# Altium PCB PIPOCPUD_2006.PCBDOC (part 9 of 10)
Units mm, origin at the board's own origin, x right, y up, seen from the top; angles counter-clockwise.
Board outline 179.96 x 114.94 mm, 2 copper layers (Top Layer, Top, Bottom Layer, Bottom), stack 1.341 mm thick; 247 components, 222 nets, 910 pads, 491 vias.
Unrouted connection lines stored in the file: 2.
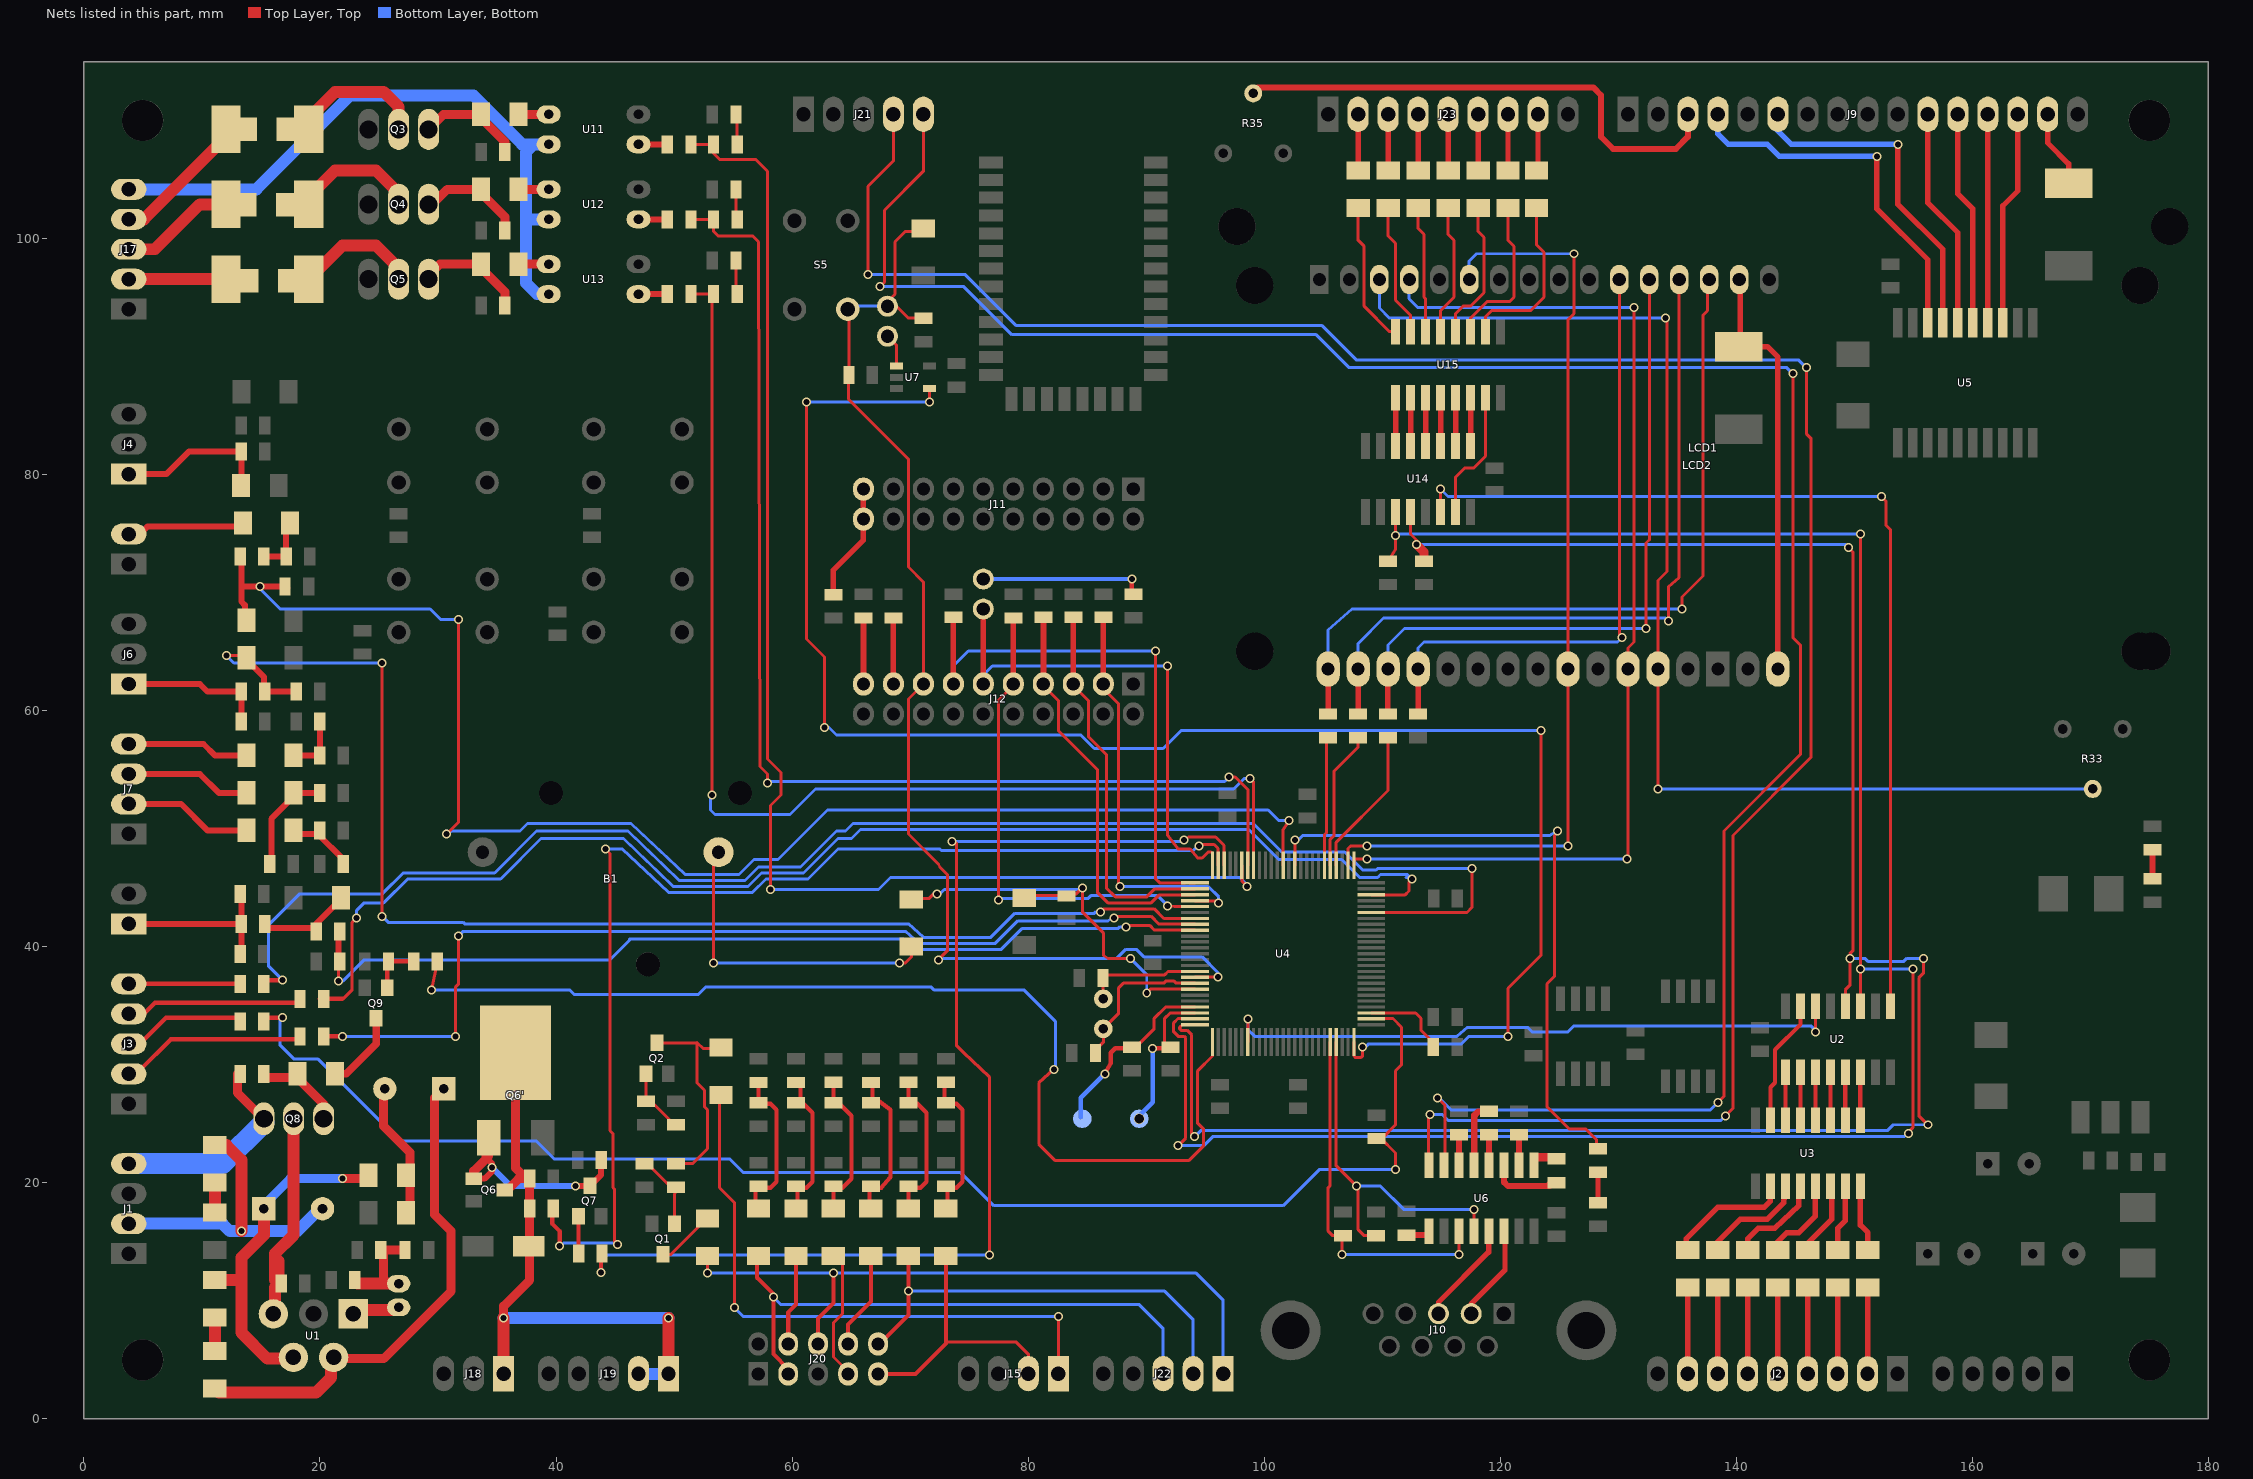
[diagram p9: the nets of this part, all layers, seen from the top]

## Via types
v1: diameter 0.762, hole 0.508, Top Layer, Top to Bottom Layer, Bottom, 489 vias
v2: diameter 0.864, hole 0.813, Top Layer, Top to Bottom Layer, Bottom, 2 vias

## Nets (pads, with @x,y where several pads share a name; then routed paths per layer and width w, separated by ;. In a path a pad name is that pad's centre, name@x,y a point inside that pad or via, vN(x,y) a via of type N, cw(c..) or ccw(c..) an arc to the next point about the centre after c; other vN are vias at no path point) (continued)
LCD_D5: R32.2 U4.79 | length 12.6
  Top Layer, Top w0.254: U4.79@106.096,46.863 106.096,48.819 110.49,53.213 110.49,54.102 R32.2@110.465,57.683
LCD_D6: R31.2 U4.80 | length 11.8
  Top Layer, Top w0.254: U4.80@105.588,46.863 105.588,49.073 105.918,49.403 105.918,54.864 107.95,56.896 R31.2@107.95,57.683
LCD_D7: R30.2 U4.81 | length 10.9
  Top Layer, Top w0.254: U4.81@105.105,46.863 105.105,49.479 105.283,49.657 105.283,57.531 R30.2@105.41,57.683
LCD_ENABLE: LCD1.6 LCD2.6 U4.77 | length 81.6
  Top Layer, Top w0.254: U4.77@107.086,46.863 107.086,48.285 107.315,48.514 v1(108.712,48.514) ; v1(125.73,48.514) LCD1.6@125.73,63.5 125.73,93.091 126.238,93.599 v1(126.238,98.679)
  Bottom Layer, Bottom w0.254: v1(108.712,48.514) v1(125.73,48.514) ; LCD2.6@117.348,96.139 117.348,98.044 117.983,98.679 v1(126.238,98.679)
LCD_RS: LCD1.4 LCD2.4 U4.76 | length 92.1
  Top Layer, Top w0.254: U4.76@107.594,46.863 107.594,47.396 v1(108.687,47.396) ; v1(130.708,47.396) 130.81,47.498 LCD1.4@130.81,63.5 130.81,65.278 131.318,65.786 v1(131.318,94.107)
  Bottom Layer, Bottom w0.254: v1(108.687,47.396) v1(130.708,47.396) ; LCD2.4@112.268,96.52 112.268,94.869 113.03,94.107 129.667,94.107 ; 129.159,94.107 v1(131.318,94.107)
LEDS_CLOCK: R40.1 U2.11 U4.24 U14.11 | length 178.2
  Top Layer, Top w0.254: v1(92.71,23.114) 93.345,23.749 93.345,32.258 93.218,32.385 92.71,32.385 92.329,32.766 92.329,33.528 92.685,33.884 U4.24@94.132,33.884 ; R40.1@110.49,72.644 111.125,73.66 v1(111.125,74.803) U14.11@111.125,76.81 ; U2.11@150.495,34.925 v1(150.495,38.1) ; v1@150.495,37.846 v1(150.495,74.93) ; v1(154.559,24.13) 154.559,24.257 154.94,24.638 v1(154.94,38.1)
  Bottom Layer, Bottom w0.254: v1(92.71,23.114) 94.869,23.114 95.631,23.876 154.178,23.876 v1(154.559,24.13) ; v1(111.125,74.803) 111.252,74.803 111.379,74.93 150.368,74.93 v1(150.495,74.93) ; v1(150.495,38.1) v1(154.94,38.1)
LEDS_DATA: U2.14 U4.32 | length 54.2
  Top Layer, Top w0.254: U4.32@98.603,31.902 v1(98.603,33.833) ; v1(146.685,32.766) 146.685,34.671 U2.14@146.685,34.925
  Bottom Layer, Bottom w0.254: v1(98.603,33.833) 98.603,32.969 99.187,32.385 116.332,32.385 117.221,33.147 122.301,33.147 122.682,32.766 125.73,32.766 126.238,33.274 146.304,33.274 146.685,32.893 v1(146.685,32.766)
LEDS_STROBE: R39.1 U2.12 U4.25 U14.12 | length 175.6
  Top Layer, Top w0.254: v1(94.107,23.876) 93.853,24.13 93.853,32.512 93.472,32.893 92.964,32.893 92.837,33.02 92.837,33.147 93.066,33.376 U4.25@94.132,33.376 ; U14.12@112.395,76.708 112.395,74.93 112.903,74.422 v1(112.903,74.041) ; U2.12@149.225,34.925 149.225,36.322 149.606,36.703 v1(149.606,38.989) 149.606,39.37 149.86,39.624 149.86,73.406 v1(149.479,73.787) ; v1(155.829,38.989) 155.829,37.719 155.448,37.338 155.448,25.654 v1(156.21,24.892) v1@156.083,24.892
  Top Layer, Top w0.762: v1(112.903,74.041) 113.538,73.406 R39.1@113.538,72.644
  Bottom Layer, Bottom w0.254: v1(94.107,23.876) 94.615,24.384 152.781,24.384 153.289,24.892 v1(156.21,24.892) ; v1(112.903,74.041) 149.225,74.041 v1(149.479,73.787) ; v1(149.606,38.989) 150.876,38.989 151.13,38.735 154.178,38.735 154.432,38.989 v1(155.829,38.989)
LIGA_NEUTRO_POT: R10.1 U4.8 | length 84.4
  Top Layer, Top w0.254: v1(31.496,32.385) 31.496,36.576 31.75,36.83 v1(31.75,40.894) ; v1(87.249,42.418) 87.376,42.545 90.424,42.545 91.084,41.885 U4.8@94.132,41.885
  Top Layer, Top w0.356: R10.1@20.32,32.385 v1(21.895,32.385)
  Bottom Layer, Bottom w0.254: v1@21.844,32.385 v1(31.496,32.385) ; v1@31.496,41.021 v1(31.75,40.894) ; v1@31.75,40.767 v1(31.75,40.894) ; v1(87.249,42.418) 86.741,42.164 79.121,42.164 77.216,40.259 70.739,40.259 69.596,41.275 32.131,41.275 v1(31.75,40.894)
NetB1_1: B1.1 D21.1 | length 27.4
  Top Layer, Top w0.254: v1(53.34,38.608) 53.34,47.625 B1.1@53.721,48.006 ; v1(69.088,38.608) 69.596,38.608 70.104,39.116 D21.1@70.104,40.005
  Bottom Layer, Bottom w0.254: v1(53.34,38.608) v1(69.088,38.608)
NetC1_1: C1.1 C3.2 R2.1 U1.4 | length 27.4
  Top Layer, Top w0.762: v1(21.895,20.32) R2.1@23.8,20.32
  Top Layer, Top w1.016: C3.2@11.1,11.735 13.335,11.735 ; C1.1@15.24,17.45 15.24,15.545 13.335,13.64 13.335,11.735 ; U1.4@17.145,5.08 15.545,5.08 13.335,7.29 13.335,11.735
  Bottom Layer, Bottom w0.762: C1.1@15.24,18.085 17.475,20.32 v1(21.895,20.32)
NetC1_2: C1.2 C4.2 J1.2 | length 25.7
  Top Layer, Top w1.016: C4.2@11.43,23.165 12.065,23.165 13.335,21.895 v1(13.335,15.875)
  Bottom Layer, Bottom w1.016: J1.2@3.81,16.51 11.735,16.51 12.37,15.875 v1(13.335,15.875) 18.085,15.875 C1.2@19.99,17.78
NetC2_1: C2.1 C5.2 R1.2 R3.2 | length 7.6
  Top Layer, Top w0.762: 25.4,11.76 25.4,14.275 R1.2@26.975,14.275
  Top Layer, Top w1.016: C5.2@23.165,11.43 C2.1@26.67,11.43
NetC2_2: C2.2 U1.1 | length 3.5
  Top Layer, Top w1.016: U1.1@23.165,9.195 C2.2@26.67,9.195
NetC3_1: C3.1 R4.1 | length 2.2
  Top Layer, Top w1.016: R4.1@11.1,6.045 C3.1@11.1,8.255
NetC4_1: C4.1 R6.1 | length 2.2
  Top Layer, Top w1.016: R6.1@11.1,17.78 C4.1@11.1,19.99
NetC6_1: C6.1 R4.2 U1.2 | length 41.7
  Top Layer, Top w0.762: U1.2@21.285,5.08 25.4,5.08 31.115,10.795 31.115,15.875 29.718,17.272 29.718,27.178 C6.1@30.48,27.61
  Top Layer, Top w1.016: R4.2@11.43,2.21 19.685,2.21 20.955,3.48 U1.2@20.955,5.08
NetC6_2: C6.2 R2.2 R5.1 | length 11.4
  Top Layer, Top w0.762: C6.2@25.4,27.61 25.4,24.765 27.61,22.555 R5.1@27.61,17.145
NetC8_2: C8.2 U4.23 X1.1 | length 13.7
  Top Layer, Top w0.254: C8.2@92.075,31.471 91.567,31.75 91.567,33.909 92.024,34.366 U4.23@94.132,34.366
  Top Layer, Top w0.356: v1(90.551,31.369) 92.075,31.369 C8.2@92.202,31.471
  Bottom Layer, Bottom w0.356: X1.1@89.154,25.4 90.551,26.797 v1(90.551,31.369)
  other v2: 89.408,25.4
NetC9_2: C9.2 U4.22 X1.2 | length 15.4
  Top Layer, Top w0.254: C9.2@89.154,31.496 90.678,33.02 90.678,33.909 91.643,34.874 U4.22@94.132,34.874
  Top Layer, Top w0.356: v1(86.487,29.21) 86.995,30.099 86.995,30.988 87.376,31.369 C9.2@88.9,31.369
  Bottom Layer, Bottom w0.356: X1.2@84.455,25.527 84.455,27.178 v1(86.487,29.21)
NetC10_2: C10.2 U4.18 X2.1 | length 13.5
  Top Layer, Top w0.254: C10.2@85.7,30.988 85.725,31.242 86.36,31.877 X2.1@86.36,33.02 86.233,32.893 87.63,34.29 87.63,36.449 88.062,36.881 91.491,36.881 91.694,37.084 92.329,37.084 92.532,36.881 U4.18@94.132,36.881
NetC11_2: C11.2 U4.16 X2.2 | length 10.1
  Top Layer, Top w0.254: X2.2@86.36,35.56 86.335,35.585 C11.2@86.335,37.338 86.233,37.592 91.567,37.592 91.846,37.871 U4.16@94.132,37.871
NetC22_2: C22.2 J8.1 R23.1 R24.2 | length 14.2
  Top Layer, Top w0.508: J8.1@3.81,41.91 R23.1@13.31,41.91 ; C22.2@13.335,39.37 R24.2@13.335,44.12
NetC26_1: C26.1 U6.3 | length 11.7
  Top Layer, Top w0.457: 120.32,20.015 U6.3@120.32,21.463 ; 120.65,19.685 123.952,19.685 124.206,19.939 124.714,19.939 C26.1@124.765,19.99
  Top Layer, Top w0.508: U6.3@120.32,21.59 120.32,20.015 120.65,19.685 124.155,19.685 C26.1@124.46,19.99
NetC26_2: C26.2 U6.1 | length 4.1
  Top Layer, Top w0.457: U6.1@122.86,21.463 122.834,21.996 C26.2@124.765,21.996
  Top Layer, Top w0.508: U6.1@122.86,22.225 C26.2@124.46,22.225
NetC28_1: C28.1 U6.5 | length 9.6
  Top Layer, Top w0.406: 117.856,22.606 117.856,25.654
  Top Layer, Top w0.457: 117.856,25.654 118.237,26.035 C28.1@119.05,26.035
  Top Layer, Top w0.508: U6.5@117.78,21.92 117.78,25.705 118.11,26.035 C28.1@119.05,26.035
NetC28_2: C28.2 U6.4 | length 5.1
  Top Layer, Top w0.457: U6.4@119.05,21.463 C28.2@119.05,24.028
  Top Layer, Top w0.508: U6.4@119.05,21.26 U6.4@119.05,21.463 C28.2@119.05,23.8
NetC29_2: C29.2 U6.2 | length 2.5
  Top Layer, Top w0.508: U6.2@121.59,21.59 C29.2@121.59,24.13
NetC30_2: C30.2 U6.6 | length 4.2
  Top Layer, Top w0.457: U6.6@116.51,21.463 116.51,23.698 C30.2@116.51,24.054
  Top Layer, Top w0.508: U6.6@116.51,22.225 C30.2@116.51,23.8
NetC33_2: C33.2 D13.1 R43.1 R91.2 | length 11.6
  Top Layer, Top w0.356: D13.1@60.452,18.034 60.452,19.558 61.214,19.558 61.722,20.066 61.722,25.908 60.706,26.924 R91.2@60.706,28.194
NetC36_2: C36.2 D14.1 R53.1 R92.2 | length 12.7
  Top Layer, Top w0.356: D14.1@66.548,18.034 66.548,19.558 67.564,19.558 68.326,20.447 68.326,26.162 67.31,26.924 66.802,26.924 R92.2@66.802,28.448
NetC42_2: C42.2 D15.1 R54.1 R93.2 | length 12.5
  Top Layer, Top w0.356: D15.1@69.85,18.288 69.85,19.558 70.866,19.558 71.374,20.066 71.374,25.908 70.612,26.67 69.85,26.67 R93.2@69.85,28.448
NetC43_2: C43.2 D16.1 R55.1 R94.2 | length 12.6
  Top Layer, Top w0.356: R94.2@72.898,28.448 72.898,26.67 73.914,26.67 74.422,26.162 74.422,20.066 73.914,19.558 73.152,19.558 D16.1@73.152,18.034
NetC44_2: C44.2 D17.1 R56.1 R95.2 | length 12.1
  Top Layer, Top w0.356: D17.1@63.5,17.78 63.5,19.558 64.262,19.558 65.024,20.32 65.024,25.654 63.5,27.178 R95.2@63.5,28.194
NetC45_2: C45.2 D18.1 R57.1 R96.2 | length 12.9
  Top Layer, Top w0.356: D18.1@56.896,18.288 56.896,19.558 58.166,19.558 58.674,20.066 58.674,26.162 58.166,26.67 57.15,26.67 R96.2@57.15,28.448
NetC48_2: C48.2 Q8.2 U1.5 | length 18.6
  Top Layer, Top w1.016: U1.5@16.18,8.89 16.18,11.1 16.51,11.43 16.51,13.335 ; 16.18,11.735 16.18,13.97 17.78,15.545 17.78,24.13 Q8.2@17.78,25.07
NetC50_2: C50.2 D20.2 D21.2 U4.19 | length 35.9
  Top Layer, Top w0.254: D21.2@70.358,44.069 71.628,44.069 72.009,44.45 v1(72.263,44.45) ; D20.2@79.756,44.323 C50.2@83.312,44.323 ; C50.2@83.312,44.45 84.074,44.45 v1(84.582,44.958) ; v1@84.582,44.831 84.582,42.926 86.36,41.148 86.36,39.243 86.741,38.989 v1(88.646,38.989) ; v1(90.043,36.068) 90.348,36.373 U4.19@94.132,36.373
  Bottom Layer, Bottom w0.254: v1@72.39,44.45 72.517,44.45 72.898,44.831 84.455,44.831 v1(84.582,44.958) ; v1(88.646,38.989) 90.043,37.592 v1(90.043,36.068)
NetD1_1: D1.1 R13.1 R14.1 | length 4.7
  Top Layer, Top w0.508: R14.1@15.24,73.025 R13.1@17.145,73.025 D1.1@17.145,75.87
NetD1_2: D1.2 J5.2 | length 8.8
  Top Layer, Top w0.508: J5.2@4.75,74.93 5.385,75.565 D1.2@13.335,75.565
NetD8_1: D8.1 R17.1 R20.1 | length 4.7
  Top Layer, Top w0.508: D8.1@17.78,56.185 R20.1@19.99,56.185 R17.1@19.99,58.725
NetD8_2: D8.2 J7.4 | length 10.2
  Top Layer, Top w0.508: J7.4@3.81,57.15 10.135,57.15 11.1,56.185 D8.2@13.64,56.185
NetD9_1: D9.1 R18.1 R21.1 | length 8.7
  Top Layer, Top w0.508: R18.1@15.621,47.117 15.875,47.625 15.875,50.8 D9.1@17.78,52.705 ; D9.1@17.45,53.01 R21.1@19.685,53.01
NetD9_2: D9.2 J7.3 | length 10.2
  Top Layer, Top w0.508: J7.3@4.115,54.61 9.83,54.61 11.43,53.01 D9.2@13.64,53.01
NetD10_1: D10.1 R19.1 R22.1 | length 5
  Top Layer, Top w0.508: D10.1@17.78,49.53 19.99,49.53 19.99,49.352 R19.1@21.844,47.498
NetD10_2: D10.2 J7.2 | length 9.8
  Top Layer, Top w0.508: J7.2@4.115,52.07 8.23,52.07 10.465,49.835 D10.2@13.03,49.835
NetD11_2: D11.2 FB1.1 R23.2 | length 7.2
  Top Layer, Top w0.508: R23.2@15.545,41.58 19.685,41.58 19.685,41.91 D11.2@21.59,43.815
NetD12_2: D12.2 J18.1 J19.1 J19.2 Q6'.2 Q6.3 R76.1 R79.1 | length 53.8
  Top Layer, Top w0.762: J18.1@35.56,3.175 J18.1@35.56,3.81 v1(35.56,8.509) 35.56,9.525 37.77,11.735 R79.1@37.77,19.99 ; Q6.3@35.865,19.355 36.83,20.32 37.465,20.32 36.576,21.209 Q6'.2@36.576,28.067
  Top Layer, Top w1.016: J18.1@35.535,3.785 v1(35.56,8.509) ; J19.1@49.53,3.81 v1(49.53,8.509)
  Bottom Layer, Bottom w1.016: v1(35.56,8.509) v1(49.53,8.509) ; J19.2@46.965,3.785 47.015,3.785 J19.1@49.505,3.785 ; J19.1@49.505,3.835 J19.1@49.53,3.81
NetD13_2: D13.2 J20.4 | length 7.7
  Top Layer, Top w0.356: J20.4@59.665,6.325 59.665,8.992 60.325,9.652 D13.2@60.325,13.792
NetD14_2: D14.2 J20.8 | length 8.3
  Top Layer, Top w0.356: J20.8@64.745,6.325 64.745,7.976 66.675,9.906 D14.2@66.675,13.792
NetD15_2: D15.2 J20.10 J22.2 | length 38.3
  Top Layer, Top w0.356: J20.10@67.285,6.325 67.412,6.325 69.85,8.763 v1(69.85,10.795) D15.2@69.85,13.792
  Bottom Layer, Bottom w0.254: v1(69.85,10.795) 91.567,10.795 93.98,8.382 J22.2@93.98,3.81
NetD16_2: D16.2 J15.2 J20.9 | length 23.2
  Top Layer, Top w0.254: 73.152,6.477 78.994,6.477 80.01,5.461 J15.2@80.01,3.81
  Top Layer, Top w0.356: J20.9@67.285,3.785 70.46,3.785 73.025,6.35 D16.2@73.025,13.792
NetD17_2: D17.2 J20.7 | length 10.9
  Top Layer, Top w0.254: D17.2@64.262,13.335 64.262,8.89 63.5,8.128 63.5,5.207 64.897,3.81 64.897,3.556 J20.7@64.745,3.785
NetD18_2: D18.2 J20.3 J22.3 | length 50.2
  Top Layer, Top w0.254: v1(58.42,10.287) v1@58.42,10.541
  Top Layer, Top w0.356: D18.2@57.15,13.792 57.023,14.224 57.023,11.938 58.42,10.541 58.42,5.461 59.665,4.216 J20.3@59.665,3.785
  Bottom Layer, Bottom w0.254: v1(58.42,10.287) 59.055,9.652 89.408,9.652 91.44,7.62 J22.3@91.44,3.81
NetD19_1: D19.1 J15.1 | length 51.1
  Top Layer, Top w0.254: D19.1@53.848,27.432 53.848,19.558 55.118,18.288 v1(55.118,9.398) ; J15.1@82.55,3.81 v1(82.55,8.636)
  Bottom Layer, Bottom w0.254: v1(55.118,9.398) 55.88,8.636 v1(82.55,8.636)
NetD19_2: D19.2 Q2.3 R59.1 | length 19.3
  Top Layer, Top w0.254: Q2.3@48.565,31.826 51.994,31.826 52.451,31.369 54.483,31.369 D19.2@53.848,31.42 ; R59.1@50.165,21.59 51.562,21.59 52.832,22.86 52.832,26.162 52.578,26.416 52.578,27.813 51.943,28.448 51.943,31.877
NetJ1_4: J1.4 Q8.3 R80.2 | length 18.2
  Top Layer, Top w0.762: R80.2@13.005,29.21 13.005,27.61 15.24,25.375 Q8.3@15.24,24.765
  Bottom Layer, Bottom w1.778: J1.4@3.81,21.59 11.76,21.59 Q8.3@15.24,25.07
NetJ2_2: J2.2 R90.2 | length 7.3
  Top Layer, Top w0.457: J2.2@151.105,3.785 151.13,4.318 R90.2@151.13,11.1
NetJ2_3: J2.3 R89.2 | length 7.3
  Top Layer, Top w0.457: J2.3@148.565,3.785 148.59,4.064 R89.2@148.59,11.125
NetJ2_4: J2.4 R88.2 | length 7.3
  Top Layer, Top w0.457: J2.4@146.025,3.785 146.05,4.953 R88.2@146.05,11.125
NetJ2_5: J2.5 R87.2 | length 7.3
  Top Layer, Top w0.457: J2.5@143.485,3.785 143.51,3.937 R87.2@143.51,11.125
NetJ2_6: J2.6 R86.2 | length 7.3
  Top Layer, Top w0.457: J2.6@140.945,3.785 140.97,3.937 R86.2@140.97,11.125
NetJ2_7: J2.7 R85.2 | length 7.3
  Top Layer, Top w0.457: J2.7@138.405,3.785 138.405,10.643 R85.2@138.43,11.125
NetJ2_8: J2.8 R77.2 | length 7.3
  Top Layer, Top w0.457: J2.8@135.865,3.785 135.865,10.947 R77.2@135.89,11.1
NetJ3_2: J3.2 R10.2 | length 14.9
  Top Layer, Top w0.356: J3.2@4.75,29.515 7.366,32.131 18.161,32.131 R10.2@18.415,32.385
NetJ3_3: J3.3 R9.2 | length 9.5
  Top Layer, Top w0.356: J3.3@4.75,31.75 6.96,33.96 R9.2@13.335,33.96
NetJ3_4: J3.4 R8.2 | length 14.1
  Top Layer, Top w0.356: J3.4@4.75,33.96 6.02,35.23 16.815,35.23 ; 16.84,35.23 R8.2@18.339,35.23
NetJ3_5: J3.5 R7.2 | length 9.5
  Top Layer, Top w0.356: J3.5@3.81,36.83 R7.2@13.335,36.83
NetJ4_1: J4.1 R15.1 R84.1 | length 12.9
  Top Layer, Top w0.508: J4.1@4.115,80.01 6.985,80.01 8.89,81.915 R15.1@13.335,81.915 R84.1@13.335,79.045
NetJ6_1: J6.1 R16.1 R41.1 | length 11.8
  Top Layer, Top w0.508: J6.1@4.115,62.23 9.83,62.23 10.465,61.595 R16.1@13.03,61.595 ; R41.1@13.335,59.055 R16.1@13.335,61.722
NetJ9_3: J9.3 R35.2 | length 44.3
  Top Layer, Top w0.508: R35.2@99.06,112.395 99.441,112.776 127.889,112.776 127.94,112.7 128.524,112.116 128.524,111.76 128.524,108.585 129.54,107.569 134.874,107.569 135.89,108.585 J9.3@135.89,110.998 ; R35.2@99.187,112.268 R35.2@99.187,112.522
NetJ9_4: J9.4 U5.18 | length 31.8
  Top Layer, Top w0.457: v1(151.892,106.934) 151.892,102.489 156.21,98.171 U5.18@156.21,92.837
  Bottom Layer, Bottom w0.457: J9.4@138.43,110.49 138.43,108.839 139.319,107.95 142.621,107.95 143.637,106.934 v1(151.892,106.934)
NetJ9_6: J9.6 U5.17 | length 29.3
  Top Layer, Top w0.457: v1(153.67,107.95) 153.67,102.87 157.48,99.06 U5.17@157.48,92.837
  Bottom Layer, Bottom w0.457: J9.6@143.51,110.49 143.383,110.744 143.383,109.22 144.653,107.95 v1(153.67,107.95)
NetJ9_11: J9.11 U5.16 | length 18.7
  Top Layer, Top w0.457: J9.11@156.21,110.49 156.21,102.997 158.75,100.457 U5.16@158.75,92.837
NetJ9_12: J9.12 U5.15 | length 18.2
  Top Layer, Top w0.457: J9.12@158.75,110.49 158.75,103.759 160.02,102.489 U5.15@160.02,92.837
NetJ9_13: J9.13 U5.14 | length 17.7
  Top Layer, Top w0.457: U5.14@161.29,92.837 J9.13@161.29,110.49
NetJ9_14: J9.14 U5.13 | length 18.2
  Top Layer, Top w0.457: U5.13@162.56,92.837 162.56,102.743 163.83,104.013 J9.14@163.83,110.49
NetJ9_15: J9.15 R36.1 | length 6.6
  Top Layer, Top w0.457: J9.15@166.37,110.49 166.37,110.363 166.37,108.077 168.148,106.299 R36.1@168.148,104.648
NetJ10_2: J10.2 U6.14 | length 8.7
  Top Layer, Top w0.457: J10.2@117.526,8.89 117.526,9.703 120.396,12.573 120.396,16.129 U6.14@120.32,15.875
NetJ10_3: J10.3 U6.13 | length 8.7
  Top Layer, Top w0.457: J10.3@114.757,8.89 114.757,9.855 118.999,14.097 U6.13@119.05,15.875
NetJ11_19: J11.19 J11.20 R98.2 | length 10
  Top Layer, Top w0.457: R98.2@63.5,69.799 63.5,71.882 66.04,74.422 J11.20@66.04,76.2 66.04,78.359 J11.19@66.04,78.74
NetJ12_17: J12.17 R50.1 | length 5.6
  Top Layer, Top w0.457: J12.17@68.58,62.23 68.58,67.564 R50.1@68.58,67.818
NetJ12_19: J12.19 R49.1 | length 5.6
  Top Layer, Top w0.254: R49.1@66.04,67.437 R49.1@66.04,67.818
  Top Layer, Top w0.508: J12.19@66.04,62.23 R49.1@66.04,67.437
NetJ13_2: J13.2 U7.1 | length 2.9
  Top Layer, Top w0.254: J13.2@68.072,91.694 68.834,90.932 U7.1@68.834,89.154
NetJ14_1: J14.1 R52.1 | length 14
  Top Layer, Top w0.356: v1(88.773,71.12) 88.773,70.231 88.773,69.85 R52.1@88.9,69.85
  Bottom Layer, Bottom w0.356: J14.1@76.2,71.12 v1(88.773,71.12)
NetJ17_2: J17.2 PSW3'.1 PSW3.2 | length 8.2
  Top Layer, Top w1.016: J17.2@3.81,96.52 11.43,96.52 PSW3.2@12.04,96.52
NetJ17_3: J17.3 PSW2'.1 PSW2.2 | length 9.8
  Top Layer, Top w1.016: J17.3@3.81,99.06 6.02,99.06 9.83,102.87 PSW2.2@12.04,102.87
NetJ17_4: J17.4 PSW1'.1 PSW1.2 | length 11.7
  Top Layer, Top w1.016: J17.4@3.81,101.6 5.08,101.6 11.43,107.95 PSW1.2@12.04,109.22
NetJ20_6: J20.6 J22.1 R58.2 | length 59.9
  Top Layer, Top w0.254: v1(52.832,12.319) R58.2@52.832,13.767 ; J20.6@62.205,6.248 J20.6@62.205,6.325
  Top Layer, Top w0.356: J20.6@62.205,6.325 62.205,8.484 63.5,9.779 v1(63.5,12.319)
  Bottom Layer, Bottom w0.254: v1(52.832,12.319) v1(63.5,12.319) 94.234,12.319 96.52,10.033 96.52,3.302 J22.1@96.52,3.81
NetJ23_2: J23.2 R99.2 | length 5.3
  Top Layer, Top w0.457: R99.2@107.95,105.715 107.95,110.744 J23.2@107.95,110.49
NetJ23_3: J23.3 R100.2 | length 4.8
  Top Layer, Top w0.457: R100.2@110.49,105.715 110.49,110.363 J23.3@110.49,110.49
NetJ23_4: J23.4 R101.2 | length 4.8
  Top Layer, Top w0.457: R101.2@113.03,105.715 113.03,110.236 J23.4@113.03,110.49
NetJ23_5: J23.5 R102.2 | length 5
  Top Layer, Top w0.457: R102.2@115.57,105.715 115.57,110.617 J23.5@115.57,110.49
NetJ23_6: J23.6 R103.2 | length 4.8
  Top Layer, Top w0.457: R103.2@118.11,105.715 118.11,110.236 J23.6@118.11,110.49
NetJ23_7: J23.7 R104.2 | length 4.8
  Top Layer, Top w0.457: R104.2@120.65,105.715 120.65,109.855 J23.7@120.65,110.49
NetJ23_8: J23.8 R105.2 | length 4.8
  Top Layer, Top w0.457: R105.2@123.063,105.715 123.19,106.045 J23.8@123.19,110.49
NetL1_1: L1.1 R12.2 | length 2.6
  Top Layer, Top w0.457: L1.1@128.27,18.288 R12.2@128.27,20.853
NetL2_1: L2.1 R62.2 | length 2.5
  Top Layer, Top w0.254: R62.2@175.26,47.879 R62.2@175.26,48.184
  Top Layer, Top w0.508: L2.1@175.26,45.72 R62.2@175.26,47.879
NetL3_1: L3.1 R65.2 | length 2.6
  Top Layer, Top w0.254: L3.1@55.245,110.49 55.347,110.084 R65.2@55.347,107.95
NetL4_1: L4.1 R69.2 | length 2.6
  Top Layer, Top w0.254: L4.1@55.245,104.14 55.245,101.727 R69.2@55.347,101.6
NetL5_1: L5.1 R73.2 | length 3.1
  Top Layer, Top w0.254: L5.1@55.245,98.095 55.245,95.123 R73.2@55.347,95.25
NetLCD1_3: LCD1.3 LCD2.3 R33.2 | length 104.4
  Top Layer, Top w0.254: v1(133.35,53.34) LCD1.3@133.35,63.5 133.35,70.993 134.112,71.755 134.112,92.837 ; v1(133.985,93.218) 134.112,92.964 134.112,92.456
  Bottom Layer, Bottom w0.254: LCD2.3@109.753,96.495 109.753,94.082 110.617,93.218 v1(133.985,93.218) ; v1(133.35,53.34) R33.2@170.18,53.34
NetLCD1_11: LCD1.11 LCD2.11 R34.1 | length 53.7
  Top Layer, Top w0.254: LCD2.11@130.073,96.495 130.073,66.396 v1(130.302,66.167)
  Top Layer, Top w0.457: R34.1@113.03,59.69 113.03,62.992 LCD1.11@113.03,63.5
  Bottom Layer, Bottom w0.254: LCD1.11@113.03,63.5 113.03,65.278 113.538,65.786 129.921,65.786 v1(130.302,66.167)
NetLCD1_12: LCD1.12 LCD2.12 R32.1 | length 58.1
  Top Layer, Top w0.254: v1(132.334,66.929) 132.334,74.168 132.588,74.422 ; 132.613,74.447 LCD2.12@132.613,96.495
  Top Layer, Top w0.457: R32.1@110.465,59.69 110.465,63.602 LCD1.12@110.49,63.5
  Bottom Layer, Bottom w0.254: LCD1.12@110.49,63.5 110.49,65.532 111.887,66.929 v1(132.334,66.929)
NetLCD1_13: LCD1.13 LCD2.13 R31.1 | length 65.5
  Top Layer, Top w0.254: v1(134.239,67.564) 134.239,70.485 135.128,71.247 135.128,75.438 LCD2.13@135.153,96.495
  Top Layer, Top w0.457: R31.1@107.95,59.69 107.95,63.754 LCD1.13@107.95,63.5
  Bottom Layer, Bottom w0.254: v1(134.239,67.564) 133.985,67.818 110.109,67.818 107.95,65.659 ; 107.95,65.659 LCD1.13@107.95,63.5 107.95,63.373 107.95,65.659
NetLCD1_14: LCD1.14 LCD2.14 R30.1 | length 66.6
  Top Layer, Top w0.254: v1(135.382,68.58) 135.382,69.596 137.16,71.374 137.16,93.472 137.541,93.853 137.541,96.266 LCD2.14@137.693,96.495
  Top Layer, Top w0.457: R30.1@105.41,59.69 105.41,62.357 LCD1.14@105.41,63.5
  Bottom Layer, Bottom w0.254: LCD1.14@105.41,63.5 105.41,66.802 107.442,68.58 v1(135.382,68.58)
NetLCD1_15: LCD1.15 LCD2.15 R29.2 | length 36.1
  Top Layer, Top w0.457: LCD2.15@140.335,96.901 140.335,90.805 142.621,90.805 143.51,89.916 LCD1.15@143.51,63.5
NetPSW1'_2: PSW1'.2 PSW1.1 Q3.2 | length 11.9
  Top Layer, Top w1.016: PSW1.1@19.05,109.22 19.05,110.16 21.285,112.395 25.4,112.395 26.67,111.125 Q3.2@26.67,109.22
NetPSW2'_2: PSW2'.2 PSW2.1 Q4.2 | length 10.8
  Top Layer, Top w1.016: PSW2.1@19.05,102.87 19.685,104.14 21.26,105.715 24.765,105.715 26.67,103.81 Q4.2@26.67,102.87
NetPSW3'_2: PSW3'.2 PSW3.1 Q5.2 | length 10.5
  Top Layer, Top w1.016: PSW3.1@19.05,96.52 21.895,99.365 24.765,99.365 26.67,97.46 Q5.2@26.67,96.52
NetQ1_1: Q1.1 R42.1 R59.2 | length 6.1
  Top Layer, Top w0.254: R42.1@47.752,21.59 49.784,19.558 R59.2@49.911,19.558 ; Q1.1@50.038,16.51 50.038,18.923 R59.2@50.165,19.583
NetQ1_3: Q1.3 R58.1 | length 5.1
  Top Layer, Top w0.254: Q1.3@49.073,13.919 49.733,13.919 52.832,17.018 R58.1@52.832,16.942
NetQ2_1: Q2.1 R60.2 R61.1 | length 5.7
  Top Layer, Top w0.254: Q2.1@47.625,29.21 R60.2@47.625,26.899 48.031,26.899 50.038,24.892 R61.1@50.165,24.892
NetQ3_1: Q3.1 R64.1 R66.2 | length 8.6
  Top Layer, Top w0.762: Q3.1@29.21,109.22 30.48,110.49 R64.1@33.325,110.49 ; R64.1@33.63,110.49 33.655,110.16 35.662,108.153 R66.2@35.662,107.315
NetQ4_1: Q4.1 R68.1 R70.2 | length 8.6
  Top Layer, Top w0.762: Q4.1@29.21,102.87 29.515,102.87 30.785,104.14 R68.1@33.63,104.14 33.655,103.81 35.662,101.803 R70.2@35.662,101.27
NetQ5_1: Q5.1 R72.1 R74.2 | length 9.3
  Top Layer, Top w0.762: Q5.1@29.21,96.52 28.88,96.52 30.15,97.79 R72.1@33.63,97.79 33.96,97.46 33.96,97.155 35.662,95.453 R74.2@35.662,94.92
NetQ6'_1: Q6'.1 Q6.1 Q7.3 R75.1 | length 18.6
  Top Layer, Top w0.508: Q6.1@33.02,20.32 33.96,20.32 34.595,20.955 v1(34.595,21.26) 34.595,21.59 33.96,22.225 ; v1(41.656,19.685) 42.85,19.685 43.815,20.65 R75.1@43.815,21.895
  Top Layer, Top w0.762: Q6.1@33.02,20.32 33.02,20.955 34.29,22.225 Q6'.1@34.29,23.495
  Bottom Layer, Bottom w0.508: v1(34.595,21.26) 36.17,19.685 v1(41.656,19.685)
NetQ7_1: Q7.1 R78.1 | length 2.9
  Top Layer, Top w0.356: R78.1@41.91,14.275 Q7.1@41.91,17.145
NetQ8_1: Q8.1 R80.1 R81.2 | length 7.3
  Top Layer, Top w0.762: R80.1@15.24,28.88 18.085,28.88 20.32,26.645 Q8.1@20.32,25.4
NetQ9_1: Q9.1 R82.1 R83.2 | length 4.1
  Top Layer, Top w0.356: Q9.1@25.705,36.83 25.705,38.735 R82.1@27.94,38.735
NetQ9_3: Q9.3 R81.1 | length 6.4
  Top Layer, Top w0.61: R81.1@21.26,29.21 22.225,29.21 24.765,31.75 Q9.3@24.765,33.63
NetR11_2: R11.2 U4.53 | length 7
  Top Layer, Top w0.254: U4.53@109.068,34.366 112.827,34.366 113.284,33.909 113.284,32.893 R11.2@114.427,31.75
NetR12_1: R12.1 U4.86 | length 54.6
  Top Layer, Top w0.254: U4.86@102.591,46.863 v1(102.591,48.997) ; v1(124.841,49.784) 124.841,49.657 124.587,49.403 124.587,37.465 123.952,36.83 123.952,26.416 125.857,24.511 127.254,24.511 128.143,23.622 128.143,22.86 R12.1@128.27,22.86
  Bottom Layer, Bottom w0.254: v1(102.591,48.997) 102.845,48.997 103.251,49.403 124.206,49.403 v1(124.841,49.784)
NetR63_2: R63.2 U11.1 | length 2.4
  Top Layer, Top w0.254: U11.1@46.99,107.95 U11.1@47.498,107.95
  Top Layer, Top w0.508: U11.1@47.498,107.95 R63.2@49.428,107.95
NetR64_2: R64.2 U11.3 | length 2.5
  Top Layer, Top w0.762: R64.2@36.83,110.49 U11.3@39.37,110.49
NetR67_2: R67.2 U12.1 | length 2.4
  Top Layer, Top w0.254: U12.1@46.99,101.6 U12.1@47.244,101.6
  Top Layer, Top w0.508: U12.1@47.244,101.6 R67.2@49.428,101.6
NetR68_2: R68.2 U12.3 | length 1.9
  Top Layer, Top w0.762: R68.2@37.465,104.14 U12.3@39.37,104.14
NetR71_2: R71.2 U13.1 | length 2.4
  Top Layer, Top w0.508: U13.1@46.99,95.25 R71.2@49.428,95.25
NetR72_2: R72.2 U13.3 | length 2.2
  Top Layer, Top w0.762: R72.2@37.135,97.79 U13.3@39.37,97.79
NetR77_1: R77.1 U3.10 | length 10.8
  Top Layer, Top w0.457: R77.1@135.89,14.275 135.763,14.224 135.763,15.24 138.43,17.907 142.367,17.907 142.875,18.415 U3.10@142.875,19.685
NetR85_1: R85.1 U3.11 | length 9
  Top Layer, Top w0.457: R85.1@138.43,14.3 138.43,14.986 140.335,16.891 142.621,16.891 144.018,18.288 U3.11@144.145,19.685
NetR86_1: R86.1 U3.12 | length 8
  Top Layer, Top w0.457: R86.1@140.97,14.3 140.97,15.24 141.859,16.129 143.256,16.129 145.288,18.034 145.288,19.177 U3.12@145.415,19.685
NetR87_1: R87.1 U3.13 | length 7.3
  Top Layer, Top w0.457: R87.1@143.51,14.3 143.51,14.986 144.272,15.748 145.288,15.748 146.685,17.145 U3.13@146.685,19.685
NetR88_1: R88.1 U3.14 | length 5.7
  Top Layer, Top w0.457: R88.1@146.05,14.3 146.05,14.859 148.082,16.891 U3.14@148.082,19.177
NetR89_1: R89.1 U3.15 | length 5.6
  Top Layer, Top w0.457: R89.1@148.59,14.3 148.59,16.129 149.225,16.764 U3.15@149.225,19.685
NetR90_1: R90.1 U3.16 | length 5.7
  Top Layer, Top w0.457: U3.16@150.495,19.685 150.495,16.383 151.13,15.748 R90.1@151.13,14.275
NetR97_1: R97.1 U6.9 | length 1.6
  Top Layer, Top w0.508: R97.1@112.395,15.545 U6.9@113.97,15.545
NetR99_1: R99.1 U15.16 | length 12.1
  Top Layer, Top w0.254: R99.1@107.95,102.54 107.95,99.822 108.458,99.314 108.458,94.234 110.617,92.075 U15.16@111.125,92.075
NetR100_1: R100.1 U15.15 | length 11.3
  Top Layer, Top w0.254: R100.1@110.49,102.54 110.49,100.203 111.125,99.568 111.125,94.742 112.395,93.472 U15.15@112.395,92.075
NetR101_1: R101.1 U15.14 | length 10.7
  Top Layer, Top w0.254: R101.1@113.03,102.54 113.03,100.838 113.538,100.33 113.538,94.996 113.665,94.869 U15.14@113.665,92.075
NetR102_1: R102.1 U15.13 | length 11.1
  Top Layer, Top w0.254: U15.13@114.935,92.075 114.935,93.853 116.078,94.996 116.078,99.822 115.57,100.33 R102.1@115.57,102.54
NetR103_1: R103.1 U15.12 | length 12
  Top Layer, Top w0.254: U15.12@116.205,92.075 116.205,93.599 116.84,94.234 117.475,94.234 118.618,95.377 118.618,100.076 118.11,100.584 R103.1@118.11,102.54
NetR104_1: R104.1 U15.11 | length 13.3
  Top Layer, Top w0.254: U15.11@117.475,92.075 117.475,93.218 118.872,94.615 120.777,94.615 121.158,94.996 121.158,99.314 120.65,99.822 R104.1@120.65,102.54
NetR105_1: R105.1 U15.10 | length 14.7
  Top Layer, Top w0.254: U15.10@118.745,92.075 118.745,93.345 119.253,93.853 122.555,93.853 123.698,94.996 123.698,98.806 123.063,99.441 R105.1@123.063,102.54
NetU2_1: U2.1 U3.6 | length 4.1
  Top Layer, Top w0.356: U3.6@144.145,25.273 U2.1@144.145,29.337
NetU2_2: U2.2 U3.5 | length 4.1
  Top Layer, Top w0.356: U3.5@145.415,25.273 145.415,28.575 U2.2@145.415,29.337
NetU2_3: U2.3 U3.4 | length 4.1
  Top Layer, Top w0.356: U3.4@146.685,25.273 146.685,25.781 U2.3@146.685,29.337
NetU2_4: U2.4 U3.3 | length 4.1
  Top Layer, Top w0.356: U3.3@147.955,25.273 147.955,28.575 U2.4@147.955,29.337
NetU2_5: U2.5 U3.2 | length 4.1
  Top Layer, Top w0.356: U3.2@149.225,25.273 149.225,28.702 U2.5@149.225,29.337
NetU2_6: U2.6 U3.1 | length 4.1
  Top Layer, Top w0.356: U3.1@150.495,25.273 150.495,28.829 U2.6@150.495,29.337
NetU2_9: U2.9 U14.14 | length 83
  Top Layer, Top w0.254: U14.14@114.935,76.81 114.935,76.835 v1(114.935,78.74) ; v1(152.273,78.105) 152.654,77.724 152.654,75.692 153.035,75.311 U2.9@153.035,34.925
  Bottom Layer, Bottom w0.254: v1(114.935,78.74) 115.57,78.105 v1(152.273,78.105)
NetU2_15: U2.15 U3.7 | length 10.7
  Top Layer, Top w0.356: U3.7@142.875,25.273 142.875,28.067 143.256,28.448 143.256,31.242 145.415,33.401 U2.15@145.415,34.925
NetU14_1: U14.1 U15.6 | length 4.1
  Top Layer, Top w0.457: U14.1@117.475,82.398 117.475,85.725 U15.6@117.475,86.487
NetU14_2: U14.2 U15.5 | length 4.1
  Top Layer, Top w0.457: U14.2@116.205,82.398 116.205,85.725 U15.5@116.205,86.487
NetU14_3: U14.3 U15.4 | length 4.1
  Top Layer, Top w0.457: U14.3@114.935,82.398 114.935,85.598 U15.4@114.935,86.487
NetU14_4: U14.4 U15.3 | length 4.1
  Top Layer, Top w0.457: U14.4@113.665,82.398 113.665,85.471 U15.3@113.665,86.487
NetU14_5: U14.5 U15.2 | length 4.1
  Top Layer, Top w0.457: U14.5@112.395,82.398 U15.2@112.395,86.487
NetU14_6: U14.6 U15.1 | length 4.1
  Top Layer, Top w0.457: U14.6@111.125,82.398 U15.1@111.125,86.487
NetU14_15: U14.15 U15.7 | length 11.2
  Top Layer, Top w0.254: U14.15@116.205,76.81 116.205,79.756 116.967,80.518 117.729,80.518 118.745,81.534 U15.7@118.745,86.487
PULSO_CONT_MOTOR: R8.1 U4.73 | length 125.1
  Top Layer, Top w0.254: 21.971,35.56 22.733,36.322 22.733,42.037 v1(23.114,42.418) ; U4.73@109.068,44.374 111.938,44.374 112.268,44.704 112.268,45.466 v1(112.522,45.72)
  Top Layer, Top w0.356: R8.1@19.99,35.56 21.895,35.56
  Bottom Layer, Bottom w0.254: v1(23.114,42.418) 23.114,43.053 23.749,43.688 25.4,43.688 27.432,45.72 35.306,45.72 38.735,49.149 45.72,49.149 ; 73.406,49.911 94.869,49.911 ; 73.533,49.911 65.786,49.911 65.024,49.149 63.881,49.149 60.96,46.228 57.404,46.228 56.261,45.085 49.911,45.085 ; 94.107,49.911 97.409,49.911 ; 97.282,49.911 98.679,49.911 101.219,47.371 106.553,47.371 108.077,45.847 109.601,45.847 109.855,46.101 112.141,46.101 v1(112.522,45.72) 112.395,45.72 112.268,45.847 112.014,45.847 ; 45.72,49.149 49.911,45.085 ; 45.72,49.149 49.911,45.085 ; 45.72,49.149 49.911,45.085
PULSO_CONT_RES: R7.1 U4.70 | length 129.2
  Top Layer, Top w0.254: U4.70@109.068,42.875 117.17,42.875 117.602,43.307 v1(117.602,46.609)
  Top Layer, Top w0.356: R7.1@15.545,37.135 v1(16.815,37.135)
  Bottom Layer, Bottom w0.254: v1@16.891,37.084 15.621,38.354 15.621,41.783 18.288,44.45 25.273,44.45 27.051,46.228 34.798,46.228 38.354,49.784 46.101,49.784 50.419,45.593 56.007,45.593 57.15,46.736 60.706,46.736 63.754,49.784 64.516,49.784 65.151,50.419 99.06,50.419 101.473,48.006 106.807,48.006 108.331,46.482 109.474,46.482 109.601,46.609 v1(117.602,46.609)
PWR_AMP: R82.2 U4.26 | length 92.5
  Top Layer, Top w0.254: v1(29.464,36.322) R82.2@29.947,38.735 ; v1(82.169,29.591) 80.899,28.448 80.899,23.241 82.296,21.844 93.599,21.844 94.869,23.114 94.869,24.511 94.361,25.019 94.361,29.464 95.606,30.709 U4.26@95.606,31.902
  Bottom Layer, Bottom w0.254: v1(29.464,36.322) 41.148,36.322 41.529,35.941 52.07,35.941 52.705,36.576 71.755,36.576 72.009,36.322 79.629,36.322 82.296,33.655 82.296,29.718 v1(82.169,29.591)
REED_DOSADOR: C19.2 D6.2 R14.2 U4.88 | length 128.9
  Top Layer, Top w0.254: v1@14.859,70.358 17.399,70.358 C19.2@17.043,70.485 ; v1(30.734,49.53) 31.75,50.546 v1(31.75,67.691) ; U4.88@101.6,46.863 101.6,49.911 v1(102.108,50.673)
  Top Layer, Top w0.508: R14.2@13.335,72.695 13.335,70.485 ; D6.2@13.64,67.615 13.64,68.91 13.335,69.215 13.335,70.485 ; C19.2@17.145,70.485 C19.2@17.043,70.485 v1(14.91,70.485) 13.335,70.485
  Bottom Layer, Bottom w0.254: v1@14.859,70.358 16.637,68.58 29.337,68.58 30.226,67.691 v1(31.75,67.691) ; v1(30.734,49.53) 30.734,49.403 31.115,49.784 31.877,49.784 36.957,49.784 37.592,50.419 42.037,50.419 46.355,50.419 50.927,46.101 55.499,46.101 56.769,47.371 58.801,47.371 62.992,51.562 63.119,51.562 68.58,51.562 100.33,51.562 101.219,50.673 v1(102.108,50.673)
  Bottom Layer, Bottom w0.508: v1@30.709,49.657 v1@30.759,49.505
RESET: C34.2 D3.1 J12.15 J13.1 R48.1 S5.2 U4.17 | length 104.3
  Top Layer, Top w0.254: S5.2@64.719,93.98 64.821,94.183 C34.2@64.821,88.392 ; C34.2@64.77,88.011 64.77,86.36 69.85,81.28 69.85,72.136 71.12,70.866 J12.15@71.12,62.23 ; J13.1@68.072,94.234 67.564,94.107 68.961,94.107 69.85,93.218 R48.1@71.12,93.218 ; J13.1@68.199,94.234 68.199,94.742 68.707,95.25 68.707,99.695 69.596,100.584 D3.1@71.628,100.584 ; J12.15@71.374,62.103 J12.15@71.12,62.23 ; v1(72.39,38.862) 73.152,39.624 73.152,46.101 72.517,46.736 72.39,46.99 69.85,49.53 69.85,60.96 J12.15@71.12,62.23 ; U4.17@94.132,37.389 v1(96.063,37.389)
  Bottom Layer, Bottom w0.254: S5.2@64.719,93.98 65.024,94.234 J13.1@68.072,94.234 ; v1(72.39,38.862) 72.517,38.989 77.978,38.989 87.503,38.989 88.265,39.751 89.154,39.751 89.789,39.116 94.742,39.116 96.063,37.795 v1(96.063,37.389)
ROT_VENTILADOR: C21.2 D7.2 R16.2 U4.7 | length 117.3
  Top Layer, Top w0.254: v1(12.065,64.643) 13.589,64.643 13.97,64.262 13.97,64.135 15.24,62.865 R16.2@15.24,61.976 ; C21.2@18.009,61.595 C21.2@18.288,61.976 ; v1(25.273,42.545) v1(25.273,64.008) ; v1(86.106,42.926) 86.36,43.18 90.678,43.18 91.491,42.367 U4.7@94.132,42.367
  Top Layer, Top w0.508: D7.2@13.64,64.44 15.24,62.84 15.24,61.9 15.494,61.595 C21.2@18.009,61.595
  Bottom Layer, Bottom w0.254: v1(12.065,64.643) 12.7,64.008 v1(25.273,64.008) ; v1(25.273,42.545) 25.781,42.037 32.131,42.037 32.258,41.91 69.85,41.91 71.12,40.767 76.835,40.767 78.867,42.799 85.598,42.799 85.725,42.926 v1(86.106,42.926)
RST_WDT: U4.50 U7.4 | length 144.2
  Top Layer, Top w0.254: v1(61.214,86.106) 61.214,66.04 62.738,64.516 v1(62.738,58.547) ; v1(71.628,86.106) U7.4@71.628,87.249 ; U4.50@107.594,31.902 107.594,30.709 107.696,30.607 108.204,30.607 108.331,30.734 v1@108.331,31.369 ; v1(120.65,32.385) 120.65,36.449 123.444,39.243 v1(123.444,58.293)
  Bottom Layer, Bottom w0.254: v1(61.214,86.106) v1(71.628,86.106) ; v1(62.738,58.547) 63.119,58.547 63.754,57.912 84.455,57.912 85.598,56.769 91.44,56.769 92.964,58.293 v1(123.444,58.293) ; v1(108.331,31.496) 108.585,31.496 108.839,31.75 116.713,31.75 117.348,32.385 v1(120.65,32.385)
RTCK: J12.11 J14.2 U4.100 | length 43.9
  Top Layer, Top w0.254: v1(91.821,63.754) 91.821,49.403 92.71,48.26 93.726,48.26 94.361,47.498 94.742,47.498 95.25,48.006 95.504,48.006 95.606,47.904 U4.100@95.606,46.863
  Top Layer, Top w0.457: J12.11@76.2,62.23 76.2,68.072 J14.2@76.2,68.58
  Bottom Layer, Bottom w0.254: J12.11@76.2,62.23 76.073,62.357 76.073,62.865 76.962,63.754 91.948,63.754 v1(91.821,63.754) v1@91.821,63.881
RXD_MOEDEIRO: R76.2 U4.99 | length 102.7
  Top Layer, Top w0.254: R76.2@39.751,17.78 39.624,17.399 39.624,16.51 40.259,15.875 v1@40.259,14.605 ; v1(44.196,48.26) 44.577,47.879 44.577,24.384 44.831,24.13 44.831,19.558 44.958,19.431 44.958,14.986 v1(45.212,14.732) ; v1(94.488,48.514) 94.742,48.641 95.758,48.641 96.088,48.311 U4.99@96.088,46.863
  Top Layer, Top w0.356: R76.2@39.675,17.78 39.675,16.51 40.31,15.875 v1(40.31,14.605)
  Bottom Layer, Bottom w0.254: v1@40.259,14.605 40.386,14.605 40.64,14.859 45.085,14.859 v1(45.212,14.732) ; v1(44.196,48.26) 45.593,48.26 49.53,44.577 56.642,44.577 57.785,45.72 61.341,45.72 61.468,45.847 61.595,45.974 63.881,48.26 72.517,48.26 72.644,48.133 93.98,48.133 94.361,48.514 v1(94.488,48.514)
RXD_PROG: R38.1 U4.47 U6.12 | length 31
  Top Layer, Top w0.254: U4.47@106.096,31.902 106.096,21.412 107.95,19.558 107.95,16.002 108.458,15.494 108.712,15.494 R38.1@109.474,15.494 ; U6.12@117.78,15.875 v1(117.78,17.729)
  Bottom Layer, Bottom w0.254: v1(107.823,19.685) 109.855,19.685 111.811,17.729 v1(117.78,17.729)
SAIDA_01: R63.1 R65.1 U4.95 | length 112.8
  Top Layer, Top w0.254: R63.1@51.435,107.95 51.562,107.95 R65.1@53.34,107.95 53.34,107.696 53.34,107.188 53.848,106.68 56.896,106.68 57.912,105.664 57.912,59.055 57.912,55.88 59.055,54.737 59.055,52.832 58.166,51.943 ; v1(58.166,44.831) 58.166,51.943 ; 58.166,51.816 58.166,51.943 ; U4.95@98.095,46.863 98.095,45.542 v1(98.552,45.085)
  Bottom Layer, Bottom w0.254: v1(58.166,44.831) 58.547,44.831 67.31,44.831 68.326,45.847 87.122,45.847 97.917,45.847 98.552,45.212 v1(98.552,45.085)
SAIDA_02: R67.1 R69.1 U4.94 | length 101.2
  Top Layer, Top w0.254: R67.1@51.435,101.6 51.689,101.6 R69.1@53.34,101.6 53.34,100.584 53.721,100.203 56.642,100.203 57.15,99.695 57.277,55.245 57.912,54.61 v1(57.912,53.848) ; v1@96.901,54.356 v1(97.028,54.356) 97.536,54.356 98.603,53.289 U4.94@98.603,46.863
  Bottom Layer, Bottom w0.254: v1@57.912,53.721 58.166,53.975 60.96,53.975 96.647,53.975 v1(97.028,54.356)
SAIDA_03: R71.1 R73.1 U4.93 | length 100.1
  Top Layer, Top w0.254: R71.1@51.435,95.25 53.213,95.25 R73.1@53.34,95.25 53.213,94.869 v1(53.213,52.832) ; v1(98.806,54.229) 99.085,53.95 U4.93@99.085,46.863
  Bottom Layer, Bottom w0.254: v1@53.086,52.705 53.086,51.562 53.467,51.181 59.817,51.181 61.976,53.34 63.119,53.34 97.409,53.34 98.298,54.229 v1(98.806,54.229)
SINCRONISMO_60HZ: C49.2 R9.1 U4.52 | length 123.7
  Top Layer, Top w0.254: R9.1@15.24,33.655 15.24,34.036 v1@16.764,34.036 ; U4.52@109.068,33.884 110.515,33.884 110.896,33.884 111.633,33.147 111.633,32.766 111.633,29.972 111.125,29.464 111.125,24.892 110.033,23.8 109.83,23.8 111.125,22.504 v1(111.125,21.082)
  Top Layer, Top w0.356: R9.1@15.24,33.96 v1(16.815,33.96)
  Bottom Layer, Bottom w0.254: v1@16.764,34.036 16.637,33.909 16.637,31.623 17.78,30.48 19.812,30.48 26.797,23.495 38.354,23.495 39.878,21.971 54.737,21.971 55.88,20.828 74.295,20.828 77.089,18.034 101.6,18.034 104.648,21.082 v1(111.125,21.082)
TCK: J12.9 R51.1 U4.5 | length 42.9
  Top Layer, Top w0.254: v1@77.47,43.942 77.546,43.739 77.47,43.815 77.47,60.833 78.74,62.103 J12.9@78.74,62.23 ; v1(91.821,43.434) 92.38,43.383 U4.5@94.132,43.383
  Top Layer, Top w0.457: J12.9@78.74,62.23 78.74,67.564 R51.1@78.74,67.818
  Bottom Layer, Bottom w0.254: v1@77.47,43.942 77.597,43.942 77.724,44.069 85.09,44.069 85.344,44.323 90.932,44.323 v1(91.821,43.434) ; v1(91.821,43.434) 91.821,43.688 91.567,43.434 v1(91.821,43.434)
  other v1: 77.495,43.942
TDI: J12.5 R46.2 U4.2 | length 37.8
  Top Layer, Top w0.254: R46.2@83.82,67.869 83.82,62.103 85.09,60.833 85.09,57.785 86.614,56.261 86.614,46.101 86.614,44.958 87.376,44.196 90.043,44.196 90.729,44.882 U4.2@94.132,44.882
  Top Layer, Top w0.457: J12.5@83.82,62.23 83.82,67.564 R46.2@83.82,67.869
TDO: J12.13 R44.2 U4.1 | length 47.2
  Top Layer, Top w0.254: v1(90.805,65.024) 90.805,46.228 90.805,45.847 90.805,45.72 91.135,45.39 91.262,45.39 91.643,45.39 U4.1@93.269,45.39 ; U4.1@93.65,45.39 U4.1@94.132,45.39
  Top Layer, Top w0.457: J12.13@73.66,62.23 R44.2@73.66,67.869
  Bottom Layer, Bottom w0.254: J12.13@73.66,62.23 73.66,62.484 73.66,63.754 74.93,65.024 v1(90.805,65.024)
TELEMETRIA_RXD: J21.4 U6.8 | length 193.7
  Top Layer, Top w0.254: v1(66.421,96.901) 66.421,104.394 68.58,106.553 J21.4@68.58,110.49 ; U6.8@113.919,21.717 113.919,25.654 v1(114.046,25.781) ; v1(139.065,25.654) 139.7,26.289 139.7,47.752 ; 139.7,47.498 139.7,49.403 146.304,56.007 146.304,83.058 145.923,83.439 145.923,88.9 v1@145.796,89.027
  Bottom Layer, Bottom w0.254: v1(66.421,96.901) 74.676,96.901 78.994,92.583 104.521,92.583 ; 104.394,92.583 104.902,92.583 107.823,89.662 145.288,89.662 v1(145.923,89.027) ; v1(114.046,25.781) 115.062,25.781 115.57,25.273 138.684,25.273 v1(139.065,25.654)
TELEMETRIA_TXD: J21.5 U6.7 | length 191.7
  Top Layer, Top w0.254: v1(67.437,95.885) 67.818,96.266 67.818,102.362 71.12,105.664 J21.5@71.12,110.49 ; v1(114.681,27.178) 115.316,26.543 U6.7@115.316,21.59 ; v1(138.43,26.797) 138.938,27.305 138.938,49.784 145.415,56.261 145.415,65.532 144.78,66.167 v1(144.78,88.519)
  Bottom Layer, Bottom w0.254: v1(67.437,95.885) 74.549,95.885 78.613,91.821 104.394,91.821 107.188,89.027 144.272,89.027 v1(144.78,88.519) ; v1(114.681,27.178) 114.808,27.178 115.824,26.162 137.795,26.162 v1(138.43,26.797)
TEMPERATURA: C32.2 FB1.2 U4.9 | length 85
  Top Layer, Top w0.254: v1(21.59,37.084) 21.59,41.529 FB1.2@21.666,41.275 21.692,40.996 C32.2@21.692,38.735 ; v1(88.265,41.656) 88.392,41.783 90.297,41.783 90.703,41.377 U4.9@94.132,41.377
  Top Layer, Top w0.508: C32.2@21.59,39.04 FB1.2@21.59,41.275
  Bottom Layer, Bottom w0.254: v1(21.59,37.084) 21.971,37.084 23.749,38.862 33.401,38.862 44.577,38.862 46.355,40.64 ; 46.228,40.64 69.342,40.64 70.358,39.751 77.724,39.751 79.502,41.529 87.63,41.529 87.757,41.656 v1(88.265,41.656)
TMS: J12.7 R45.2 U4.3 | length 36
  Top Layer, Top w0.254: J12.7@81.28,62.103 82.55,60.833 82.55,58.293 84.074,56.769 85.852,54.991 85.852,45.72 85.852,44.577 86.741,43.688 86.995,43.688 90.424,43.688 91.11,44.374 U4.3@94.132,44.374 ; 81.28,65.786 R45.2@81.28,67.869
  Top Layer, Top w0.508: J12.7@81.28,62.103 R45.2@81.28,67.691
TRSTN: J12.3 R47.2 U4.4 | length 40.3
  Top Layer, Top w0.254: R47.2@86.36,67.869 86.36,61.849 87.63,60.579 87.63,45.212 v1(87.757,45.085) ; U4.4@94.132,43.866 95.961,43.866 v1(96.139,43.688)
  Top Layer, Top w0.457: J12.3@86.36,62.23 86.36,67.818 R47.2@86.36,67.869
  Bottom Layer, Bottom w0.254: v1(87.757,45.085) 95.25,45.085 96.139,44.196 v1(96.139,43.688)
TXD_MOEDEIRO: R78.2 U4.98 | length 97.8
  Top Layer, Top w0.254: R78.2@43.815,13.589 R78.2@43.891,13.97 ; v1(73.533,48.895) 73.914,48.768 73.914,31.623 74.549,30.988 76.708,28.956 v1(76.708,13.843) ; v1(93.218,49.022) 93.599,49.276 95.885,49.276 96.596,48.565 U4.98@96.596,46.863
  Top Layer, Top w0.356: v1(43.815,12.37) R78.2@43.815,13.97
  Bottom Layer, Bottom w0.254: v1@43.815,12.446 43.815,13.335 44.323,13.843 v1(76.708,13.843) ; v1(73.533,48.895) 73.787,48.895 93.091,48.895 v1(93.218,49.022) v1@93.091,49.022
TXD_PROG: R37.1 U4.46 U6.11 | length 31
  Top Layer, Top w0.254: U4.46@105.588,31.902 105.588,19.736 105.41,19.558 105.41,15.875 105.791,15.494 106.172,15.494 R37.1@106.68,15.494 ; v1(106.604,13.919) R37.1@106.604,15.545 ; v1(116.51,13.919) U6.11@116.51,15.875
  Bottom Layer, Bottom w0.254: v1(106.604,13.919) v1(116.51,13.919)
VH: J17.5 U11.4 U12.4 U13.4 | length 58
  Bottom Layer, Bottom w1.016: J17.5@3.81,104.14 7.62,104.14 14.605,104.14 22.53,112.065 33.02,112.065 37.135,107.95 U11.4@39.37,107.95 38.1,107.95 37.465,107.315 37.465,101.6 ; U13.4@39.37,95.25 38.405,95.25 37.465,96.19 37.465,101.6 ; U12.4@39.37,101.6 37.465,101.6
pads on no net: B1.Dummy1 B1.Dummy2 B1.Dummy3 J9.7 J9.8 J9.9 J9.10 J10.1 J10.4 J10.6 J10.7 J10.8 J10.9 J10._1 J10.A2 J19.3 J20.5 J21.3 LCD1.7 LCD1.8 LCD1.9 LCD1.10 LCD1._1 LCD1._2 LCD1._3 LCD1.A4 LCD2.7 LCD2.8 LCD2.9 LCD2.10 LCD2._1 LCD2._2 LCD2._3 LCD2.A4 M1.3 M1.4 M1.5 M1.6 M1.7 M1.8 M1.9 M1.10 M1.11 M1.14 M1.15 M1.16 M1.17 M1.18 M1.19 M1.20 M1.23 M1.24 M1.25 M1.26 M1.27 M1.28 M1.29 M1.30 M1.31 M1.32 M1.33 M1.34 S1._1 S1.A2 S2._1 S2.A2 S3._1 S3.A2 S4._1 S4.A2 S5._1 S5.A2 U2.7 U3.9 U4.13 U4.14 U4.34 U4.35 U4.38 U4.39 U4.40 U4.43 U4.44 U4.51 U4.58 U4.87 U5.11 U5.12 U7.3 U14.7 U14.9 U15.9
copper on no net: | length 367.1
  Top Layer, Top w1.016: 39.04,74.524 41.478,74.524 ; 39.04,75.286 41.478,75.286 ; 39.294,76.048 41.478,76.048 ; 40.056,76.81 41.478,76.81 ; 40.818,77.572 41.58,77.572 ; 41.046,73.762 41.554,73.762 ; 41.199,69.952 41.758,69.952 ; 41.199,70.714 41.402,70.714 ; 41.199,71.476 41.402,71.476 ; 41.199,72.238 41.758,72.238 ; 41.199,73 41.732,73 ; 41.605,69.19 44.272,69.19 ; 41.707,68.428 43.028,68.428 ; 43.307,68.428 44.272,68.428 ; 174.168,52.146 176.403,52.146 ; 174.168,52.908 176.428,52.908 ; 174.168,53.67 176.428,53.67 ; 174.168,54.432 176.454,54.432 ; 174.168,55.194 176.479,55.194 ; 174.168,55.956 176.479,55.956 ; 174.168,56.718 176.505,56.718 ; 174.168,57.48 176.53,57.48 ; 174.295,58.242 175.946,58.242 ; 41.478,76.048 41.554,75.743 41.631,75.667 41.554,75.565 41.478,75.26 41.478,74.066 41.554,73.762 ; 41.478,76.048 41.478,77.241 41.554,77.546 41.859,77.851 42.012,77.902 41.732,78.181 41.402,78.181 39.04,75.794 39.04,73.863 39.319,74.143 39.37,74.219 39.599,74.27 39.751,74.346 39.827,74.346 40.005,74.371 40.157,74.346 40.234,74.346 40.386,74.27 40.615,74.219 41.072,73.762 41.123,73.533 41.199,73.381 41.199,73.304 41.224,73.152 41.199,72.974 41.199,69.545 41.3,69.52 41.605,69.215 41.707,68.91 41.707,67.716 41.681,67.666 42.24,68.224 43.18,68.478 44.094,68.224 44.272,68.072 44.272,69.647 44.094,69.494 43.18,69.24 42.24,69.494 41.554,70.18 41.3,71.12 41.554,72.034 41.935,72.441 41.732,72.974 41.732,73.584 41.554,73.762 ; 174.168,51.384 174.371,51.46 174.93,51.46 174.981,51.486 176.378,51.486 176.53,57.683 175.565,58.623 174.295,58.623 174.346,58.42 174.168,57.734 174.168,51.384
  Bottom Layer, Bottom w0.508: 16.84,17.374 17.983,17.374 ; 16.84,17.755 18.364,17.755 ; 16.84,18.136 18.644,18.136 ; 17.069,18.517 18.745,18.517 ; 17.45,18.898 19.05,18.898 ; 17.831,19.279 19.609,19.279 ; 70.46,11.557 93.929,11.557 ; 76.835,20.93 77.876,20.93 ; 76.937,20.549 77.978,20.549 ; 77.267,20.168 78.435,20.168 ; 77.648,19.787 78.537,19.787 ; 90.246,9.83 91.465,9.83 ; 90.627,9.449 91.846,9.449 ; 91.008,9.068 92.227,9.068 ; 91.389,8.687 92.608,8.687 ; 91.77,8.306 92.989,8.306 ; 92.1,7.925 93.243,7.925 ; 92.177,6.02 93.243,6.02 ; 92.177,6.401 93.243,6.401 ; 92.177,6.782 93.243,6.782 ; 92.177,7.163 93.243,7.163 ; 92.177,7.544 93.243,7.544 ; 92.202,11.176 94.31,11.176 ; 92.329,5.639 93.091,5.639 ; 92.583,10.795 94.691,10.795 ; 92.608,44.044 95.199,44.044 ; 92.761,43.663 95.098,43.663 ; 92.786,43.282 95.199,43.282 ; 92.964,10.414 95.072,10.414 ; 93.345,10.033 95.453,10.033 ; 93.726,9.652 95.783,9.652 ; 94.107,9.271 95.783,9.271 ; 94.488,8.89 95.783,8.89 ; 94.717,5.842 95.301,5.842 ; 94.717,6.223 95.783,6.223 ; 94.717,6.604 95.783,6.604 ; 94.717,6.985 95.783,6.985 ; 94.717,7.366 95.783,7.366 ; 94.717,7.747 95.783,7.747 ; 94.717,8.128 95.783,8.128 ; 95.402,48.87 98.654,48.87 ; 95.504,48.489 99.035,48.489 ; 95.783,8.509 94.717,8.509 ; 96.368,22.073 97.765,22.073 ; 98.044,22.073 103.429,22.073 ; 98.704,21.692 103.048,21.692 ; 98.857,21.311 102.667,21.311 ; 100.355,20.93 102.286,20.93 ; 100.609,19.787 101.143,19.787 ; 100.609,20.549 101.905,20.549 ; 100.711,20.168 101.524,20.168 ; 110.49,94.717 111.531,94.717 ; 110.541,94.336 111.735,94.336 ; 110.769,95.098 111.252,95.098 ; 16.84,16.993 16.84,18.263 17.882,19.329 19.812,19.329 19.38,19.202 18.771,18.593 18.593,17.983 17.602,16.993 ; 16.84,16.993 17.602,16.993 ; 16.84,16.993 17.602,16.993 ; 77.521,71.907 77.394,72.034 88.341,72.034 88.24,71.984 88.138,71.907 ; 77.521,71.907 88.138,71.907 ; 77.521,71.907 88.138,71.907 ; 77.978,20.549 78.334,20.193 78.486,20.142 78.461,20.066 78.613,19.533 78.74,19.406 ; 77.978,20.549 77.826,21.082 77.851,21.184 76.606,21.184 76.81,20.955 76.962,20.447 78.029,19.406 ; 78.029,19.406 78.74,19.406 ; 78.029,19.406 78.74,19.406 ; 92.685,42.901 92.837,43.434 92.685,43.942 92.329,44.298 92.227,44.348 94.92,44.348 95.199,44.069 95.098,43.688 95.25,43.155 95.479,42.926 95.453,42.901 ; 92.685,42.901 95.453,42.901 ; 92.685,42.901 95.453,42.901 ; 94.717,8.509 94.59,8.788 94.386,8.992 91.973,11.405 91.694,11.532 70.51,11.532 70.46,11.582 93.904,11.582 95.783,9.703 95.783,5.918 95.529,5.918 95.301,5.842 ; 94.717,8.509 94.717,5.766 94.742,5.74 95.021,5.461 95.072,5.613 95.301,5.842 ; 95.402,48.108 95.504,48.514 95.352,49.022 95.225,49.174 98.349,49.174 99.416,48.108 ; 95.402,48.108 99.416,48.108 ; 95.402,48.108 99.416,48.108 ; 98.882,20.93 98.933,21.082 98.781,21.59 98.425,21.946 97.917,22.098 97.384,21.946 97.231,21.819 96.114,21.819 96.495,22.2 103.556,22.2 100.762,19.406 ; 98.882,20.93 99.009,20.93 ; 98.882,20.93 99.009,20.93 ; 99.009,20.93 99.162,21.057 99.695,21.209 100.203,21.057 100.559,20.701 100.711,20.193 100.559,19.66 100.305,19.406 ; 100.305,19.406 100.762,19.406 ; 100.305,19.406 100.762,19.406 ; 110.922,93.955 110.49,94.386 110.49,94.793 110.998,95.301 111.023,95.377 111.023,95.301 111.531,94.818 111.531,94.717 ; 110.922,93.955 112.116,93.955 ; 110.922,93.955 112.116,93.955 ; 111.531,94.717 111.633,94.437 111.836,94.234 112.116,93.955 ; 90.043,10.058 91.237,10.058 93.243,8.052 93.243,5.766 93.193,5.74 92.71,5.258 92.202,5.74 92.177,5.766 92.177,7.747 92.05,8.026 91.846,8.23 90.043,10.058
  other v2: 84.582,25.4

## Other copper
Top Layer, Top:
  text "090909" at 178.867,83.185 h1.25 r90
  text "F.Comp" at 178.867,73.66 h1.25 r90
Bottom Layer, Bottom:
  rectangle net GND: 147.193,30.734 155.448,32.131
  rectangle net GND: 151.892,30.505 154.559,31.623
  text "F.Solda" at 17.145,112.598 h1.25
  text "090909" at 17.78,110.058 h1.25